# EAGLE board eDice-v1.1 (EAGLE 5.07)
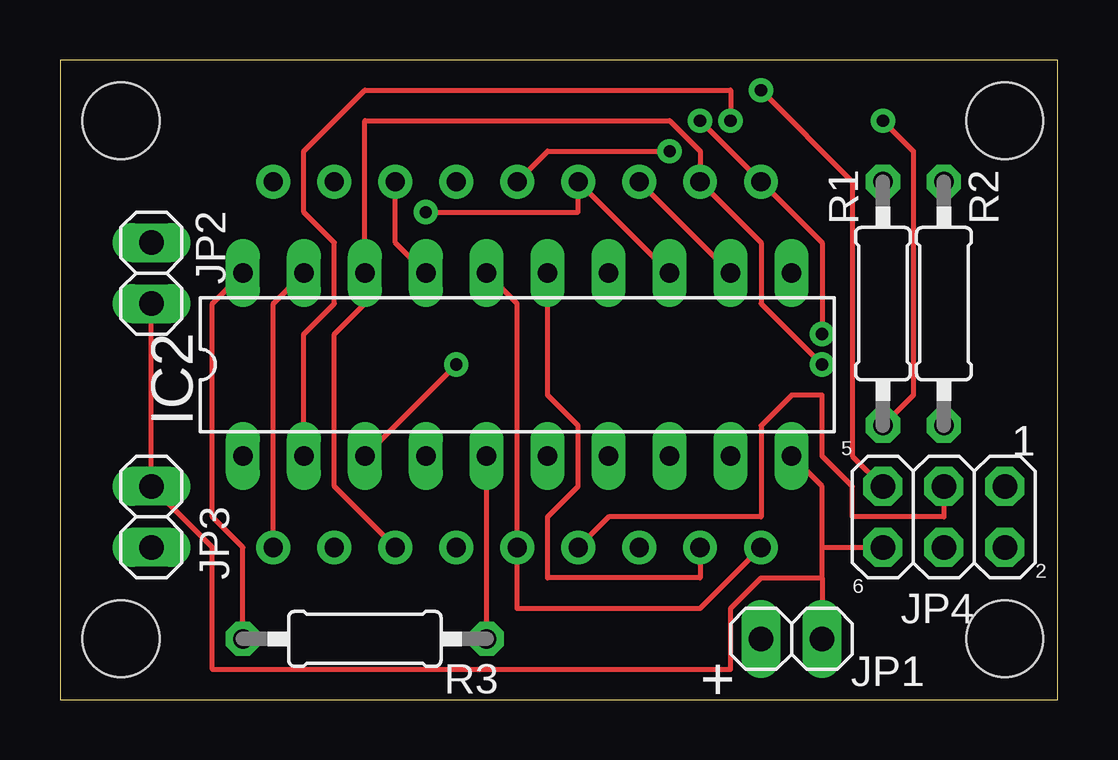
[diagram p0: board, top side]
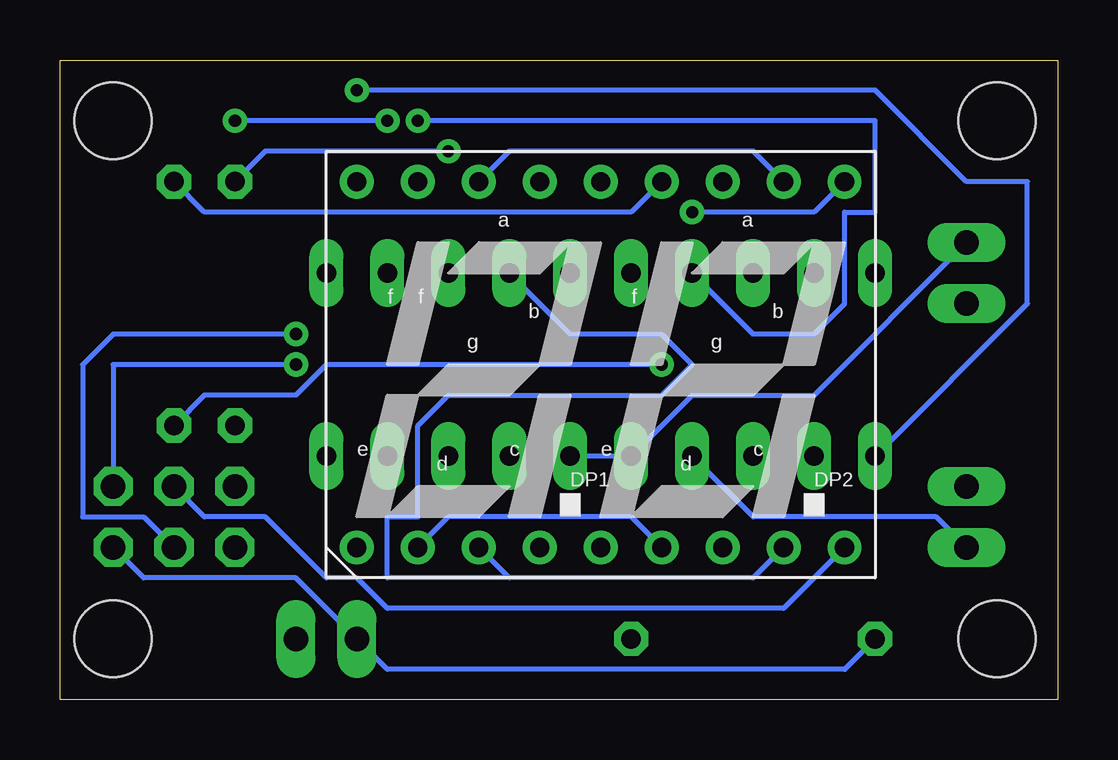
[diagram p1: board, bottom side, seen from below]

Size 41.58 x 26.66 mm. Coordinates in mm from the lower left corner, seen from the top.
Outline: 0,0 41.58,0 41.58,26.66 0,26.66 0,0
Copper layers (1*16): Top 0.035mm / dielectric 1.5mm / Bottom 0.035mm
Design rules "SparkFun": minimum track width 8mil, minimum drill 20mil, track to track 8mil, track to pad 8mil, pad to pad 8mil, via to via 8mil, smd to smd 8mil, copper to edge 10mil, drill to drill 8mil, minimum pad ring 12mil, minimum via ring 10mil, stop-mask expansion 4mil, vias tented up to drill 25mil, thermal gap 10mil
Holes 3.2 mm at 2.54,24.13 2.54,2.54 39.37,2.54 39.37,24.13

## Footprints (pad centres in the part's own frame; a part is rotated, then mirrored left to right if it is on the bottom)
DIL20 = drill 0.813 long: 1 -11.43,-3.81; 2 -8.89,-3.81; 3 -6.35,-3.81; 4 -3.81,-3.81; 5 -1.27,-3.81; 6 1.27,-3.81; 7 3.81,-3.81; 8 6.35,-3.81; 9 8.89,-3.81; 10 11.43,-3.81; 11 11.43,3.81; 12 8.89,3.81; 13 6.35,3.81; 14 3.81,3.81; 15 1.27,3.81; 16 -1.27,3.81; 17 -3.81,3.81; 18 -6.35,3.81; 19 -8.89,3.81; 20 -11.43,3.81
1X02 = drill 1.016 long: 1 -1.27,0; 2 1.27,0
2X03 = drill 1.016 octagon: 1 -2.54,-1.27; 2 -2.54,1.27; 3 0,-1.27; 4 0,1.27; 5 2.54,-1.27; 6 2.54,1.27
0207/10 = drill 0.813 octagon: 1 -5.08,0; 2 5.08,0
DUAL7-SEGMENTLED = drill 0.8 round: A1 -5.08,7.62; A2 7.62,7.62; B1 -2.54,7.62; B2 10.16,7.62; C1 -5.08,-7.62; C2 7.62,-7.62; CATH1 0,7.62; CATH2 2.54,7.62; D1 -7.62,-7.62; D2 2.54,-7.62; DP1 -2.54,-7.62; DP2 10.16,-7.62; E1 -10.16,-7.62; E2 0,-7.62; F1 -10.16,7.62; F2 5.08,7.62; G1 -7.62,7.62; G2 5.08,-7.62

## Placement (x,y rotation side)
IC2  TINY2313LP  [DIL20]  19.05,13.97 0 top
JP1  Power  [1X02]  30.48,2.54 0 top
JP2  INC  [1X02]  3.81,17.78 270 top
JP3  Roll  [1X02]  3.81,7.62 90 top
JP4  ISP  [2X03]  36.83,7.62 180 top
R1  33  [0207/10]  34.29,16.51 270 top
R2  33  [0207/10]  36.83,16.51 270 top
R3  10K  [0207/10]  12.7,2.54 0 top
U$1  DUAL7SEGMENTLED  [DUAL7-SEGMENTLED]  19.05,13.97 0 bottom

## Library data of the parts
IC2 = minipov
JP1-JP4 = pinhead
R1-R3 = resistor
U$1 = mkp

## Nets
GND: IC2.10 JP1.2 JP2.2 JP3.2 JP4.6
N$1: IC2.5 IC2.6 JP2.1 R3.2
N$2: IC2.4 JP3.1
N$3: IC2.12 U$1.A1 U$1.A2
N$4: IC2.13 U$1.B1 U$1.B2
N$5: IC2.14 U$1.C1 U$1.C2
N$6: IC2.15 U$1.D1 U$1.D2
N$7: IC2.16 U$1.E1 U$1.E2
N$8: IC2.17 JP4.4 U$1.F1 U$1.F2
N$10: IC2.19 JP4.3 U$1.DP1 U$1.DP2
N$11: R1.1 U$1.CATH1
N$12: IC2.18 JP4.1 U$1.G1 U$1.G2
N$13: R2.1 U$1.CATH2
N$14: IC2.2 R1.2
N$15: IC2.3 R2.2
N$19: IC2.1 JP4.5
VCC: IC2.20 JP1.1 JP4.2 R3.1

## Tracks (layer width: path | path; a pad name or v marks a point on that pad's centre or on a via)
GND
  Top 0.203: JP2.2 JP3.2 6.35,6.35 6.35,1.27 27.94,1.27 27.94,3.81 29.21,5.08 31.75,5.08 | IC2.10 31.75,8.89 31.75,6.35 | 31.75,5.08 JP1.2 | 31.75,5.08 31.75,6.35 | 31.75,6.35 JP4.6
N$1
  Top 0.203: R3.2 IC2.5
  Bottom 0.203: IC2.6 IC2.5 15.24,12.7 10.16,12.7 JP2.1
N$2
  Bottom 0.203: IC2.4 12.7,7.62 5.08,7.62 JP3.1
N$3
  Top 0.203: U$1.A1 IC2.12
  Bottom 0.203: U$1.A2 12.7,22.86 22.86,22.86 U$1.A1
N$4  (via drill 0.51)
  Top 0.203: v15.24,20.32 21.59,20.32 U$1.B1 IC2.13
  Bottom 0.203: U$1.B2 10.16,20.32 v15.24,20.32
N$5
  Bottom 0.203: U$1.C2 12.7,5.08 22.86,5.08 | 22.86,5.08 U$1.C1 | IC2.14 20.32,15.24 16.51,15.24 15.24,13.97 16.51,12.7 25.4,12.7 26.67,11.43 26.67,7.62 27.94,7.62 27.94,5.08 22.86,5.08
N$6
  Top 0.203: IC2.15 20.32,12.7 21.59,11.43 21.59,8.89 20.32,7.62 20.32,5.08 26.67,5.08 U$1.D1
  Bottom 0.203: U$1.D2 17.78,7.62 25.4,7.62 U$1.D1
N$7
  Top 0.203: IC2.16 19.05,16.51 U$1.E2 19.05,3.81 26.67,3.81 U$1.E1
N$8  (via drill 0.51)
  Top 0.203: U$1.F2 13.97,19.05 IC2.17 | v31.75,15.24 31.75,19.05 U$1.F1 v26.67,24.13
  Bottom 0.203: v31.75,15.24 39.37,15.24 40.64,13.97 40.64,7.62 38.1,7.62 JP4.4 | IC2.17 12.7,15.24 10.16,15.24 8.89,16.51 8.89,20.32 7.62,20.32 7.62,24.13 v26.67,24.13
N$10
  Top 0.203: U$1.DP2 8.89,16.51 IC2.19 | U$1.DP1 22.86,7.62 29.21,7.62 29.21,11.43 30.48,12.7 31.75,12.7 31.75,10.16 33.02,8.89 33.02,7.62 36.83,7.62 JP4.3
  Bottom 0.203: U$1.DP2 11.43,3.81 27.94,3.81 29.21,5.08 30.48,5.08 33.02,7.62 35.56,7.62 JP4.3
N$11  (via drill 0.51)
  Top 0.203: U$1.CATH1 20.32,22.86 v25.4,22.86
  Bottom 0.203: v25.4,22.86 33.02,22.86 R1.1
N$12  (via drill 0.51)
  Top 0.203: U$1.G2 11.43,8.89 11.43,15.24 12.7,16.51 IC2.18 12.7,24.13 25.4,24.13 26.67,22.86 U$1.G1 29.21,19.05 29.21,16.51 v31.75,13.97
  Bottom 0.203: JP4.1 39.37,13.97 v31.75,13.97
N$13
  Bottom 0.203: U$1.CATH2 17.78,20.32 35.56,20.32 R2.1
N$14  (via drill 0.51)
  Top 0.203: IC2.2 10.16,15.24 11.43,16.51 11.43,19.05 10.16,20.32 10.16,22.86 12.7,25.4 27.94,25.4 v27.94,24.13 | v34.29,24.13 35.56,22.86 35.56,12.7 R1.2
  Bottom 0.203: v27.94,24.13 v34.29,24.13
N$15  (via drill 0.51)
  Top 0.203: IC2.3 v16.51,13.97
  Bottom 0.203: v16.51,13.97 30.48,13.97 31.75,12.7 35.56,12.7 R2.2
N$19  (via drill 0.51)
  Top 0.203: v29.21,25.4 33.02,21.59 33.02,10.16 JP4.5
  Bottom 0.203: IC2.1 1.27,16.51 1.27,21.59 3.81,21.59 7.62,25.4 v29.21,25.4
VCC
  Top 0.203: IC2.20 6.35,16.51 6.35,7.62 7.62,6.35 R3.1
  Bottom 0.203: R3.1 8.89,1.27 27.94,1.27 JP1.1 31.75,5.08 38.1,5.08 JP4.2

## Text on the board
tPlace: 5 | 1 | 2 | 6 | +
tDocu: V 1.1 | E-die | Increment | ISP | Roll